# Altium PCB PCB1_t2.PcbDoc
Units mil, origin at the board's own origin, x right, y up, seen from the top; angles counter-clockwise.
Board outline 2375 x 2780 mil, 2 copper layers (Top Layer, Bottom Layer); 10 components, 13 nets, 57 pads, 0 vias.
Unrouted connection lines stored in the file: 7.
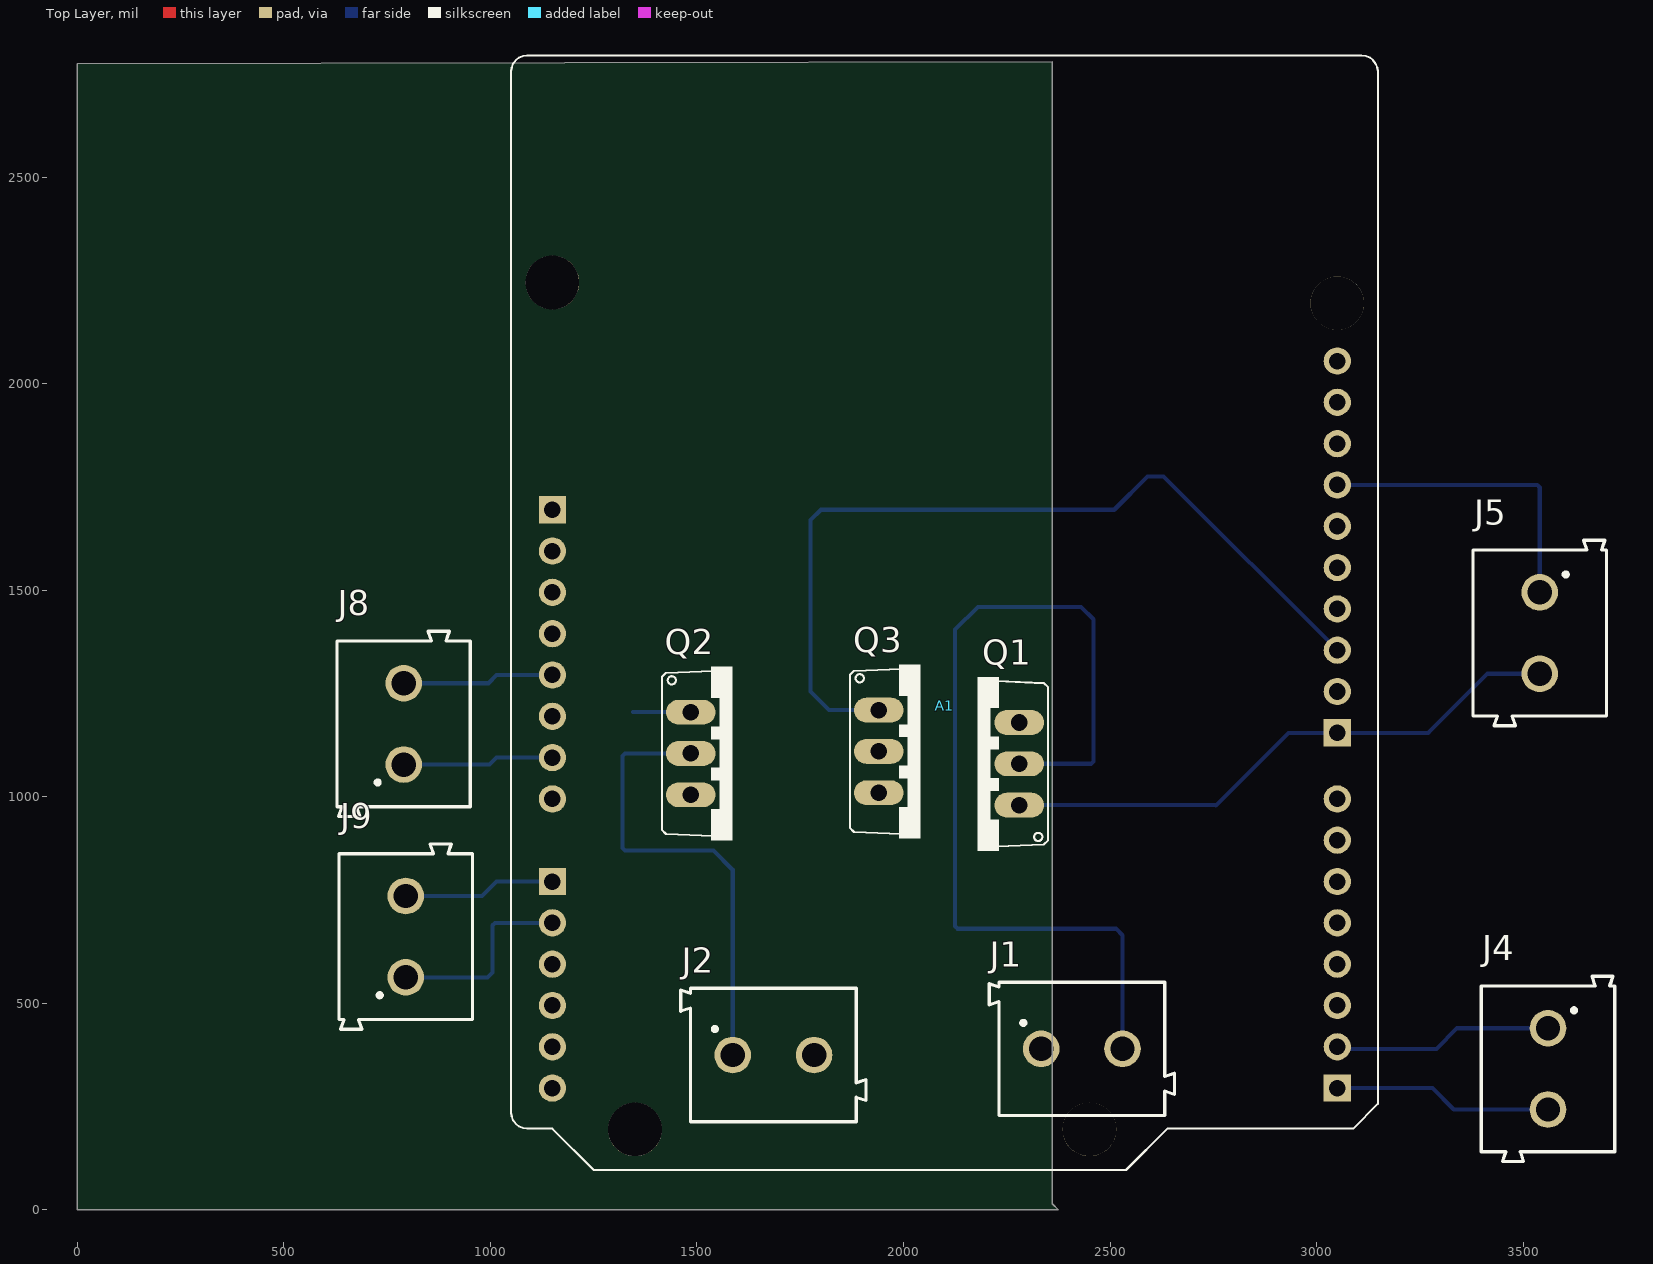
[diagram p0: Top Layer view]
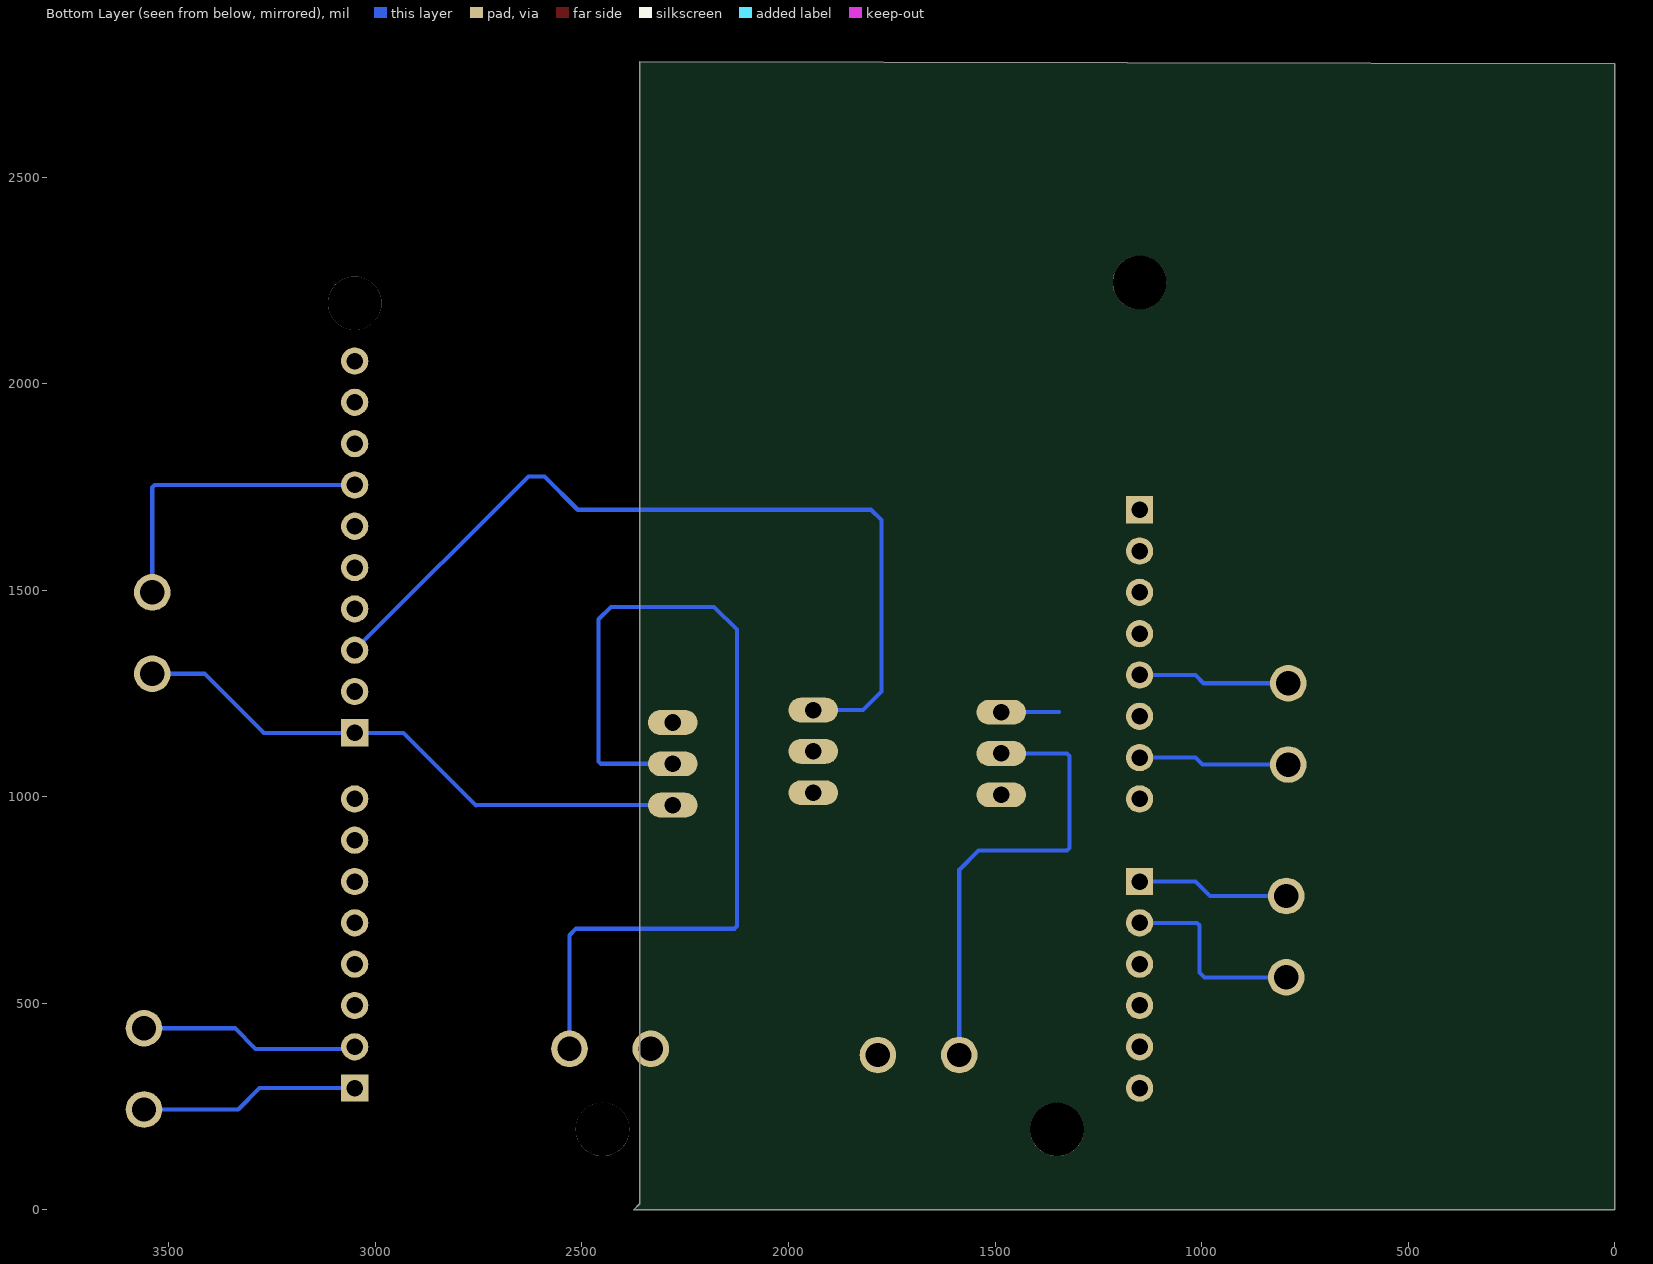
[diagram p1: Bottom Layer view, seen from below]

## Layer stack, top to bottom
Top Solder: solder mask 0.4, Solder Resist, Dk 3.5
Top Layer: signal copper 1.4
Dielectric 1: dielectric 12.6, FR-4, Dk 4.8
Bottom Layer: signal copper 1.4
Bottom Solder: solder mask 0.4, Solder Resist, Dk 3.5

## Board outline
0,2775 0,0 2375,0 2360,15 2360,2780

## Design rules (kind name [scope] priority, off if disabled: settings)
Clearance [All] p1: gap=10 ignorepadtopadclearanceinfootprint=FALSE except(0: Arc-Hole Track-Hole SMDPad-Hole THPad-Hole Via-Hole Fill-Hole Poly-Hole Region-Hole Text-Hole)
PolygonConnect [All] p1: connectstyle=Relief reliefconductorwidth=10 reliefentries=4 polygonreliefangle="90 Angle" airgapwidth=10
RoutingVias [All] p1: holewidth=28 width=50 viastyle="Through Hole" minholewidth=28 minwidth=50 maxholewidth=28 maxwidth=50
SolderMaskExpansion [All] p1: expansion=4 istentingtop=FALSE
Width [All] p1: maxlimit=24 minlimit=6 preferedwidth=12 minimp=50.000000 maximp=50.000000 favimp=50.000000
30 further rules are at their usual default settings.

## Components (designator, comment, footprint, x,y, rotation, side; value= is the part's Value field where it differs from the comment)
A1 "A000066" ARDUINO_A000066 1050,2795 r270 top locked
J1 "691111710002" 691111710002 2431.57,390 r0 top
J2 "691111710002" 691111710002 1685,375 r0 top
J4 "691111710002" 691111710002 3560,341.57 r270 top
J5 "691111710002" 691111710002 3540,1396.57 r270 top
J8 "691111710002" 691111710002 790,1176.57 r90 top
J9 "691111710002" 691111710002 795,661.57 r90 top
Q1 "FQP30N06L" TO220V 2180,1080 r90 top
Q2 "FQP30N06L" TO220V 1585,1105 r270 top
Q3 "FQP30N06L" TO220V 2040,1110 r270 top

## Footprints (in the part's own frame and the unit in brackets; to place one, negate y for a bottom-side part, rotate by r counter-clockwise, add the part's x,y. Pads: shape width x height; smd on the part's side, far side on the other; paste and mask are expansions set on the pad)
691111710002 [mm]
  round 2.25 hole 1.5: 1(-2.5,0) 2(2.5,0)
  silkscreen extent -5.7,-4.1 5.7,4.1
ARDUINO_A000066 [mil]
  round 66 hole 40: 3V3(1400,100) 5V(1500,100) A1(2100,100) A2(2200,100) A3(2300,100) A4(2400,100) A4(SDA)(840,2000) A5(2500,100) A5(SCL)(740,2000) AREF(940,2000) D1(2400,2000) D2(2300,2000) D3(2200,2000) D4(2100,2000) D5(2000,2000) D6(1900,2000) D7(1800,2000) D9(1540,2000) D10(1440,2000) D11(1340,2000) D12(1240,2000) D13(1140,2000) GND_1(1700,100) GND_2(1600,100) GND_3(1040,2000) IOREF(1200,100) RST(1300,100) VIN(1800,100)
  rect 66x66 / inner round 66 / far side rect 66x66 hole 40: A0(2000,100) D0(2500,2000) D8(1640,2000) P1(1100,100)
  round 129.92 hole 129.92 unplated: ""(550,100) ""(600,2000) ""(2600,1400) ""(2600,300)
  silkscreen extent 0,0 2698,2098, body extent -1606,-1050 1350,1050, height 467
TO220V [mil]
  oval 60x120 hole 40: 1(-100,-100) 2(0,-100) 3(100,-100)
  silkscreen extent -210,-170 210,0

## Part data
A1: "Microcontroller board based on the ATmega328P.", Package="Non-Standard Arduino", Availability="Not in stock", Check_prices=https://www.snapeda.com/parts/Arduino%20Uno%20Rev3/Arduino/view-part/?ref=eda, MF=Arduino, MP="Arduino Uno Rev3", Price=None, SnapEDA_Link=https://www.snapeda.com/parts/Arduino%20Uno%20Rev3/Arduino/view-part/?ref=snap
J1 J2 J4 J5 J8 J9: "2 Position Wire to Board Terminal Block Horizontal with Board 0.197 (5.00mm) Through Hole", Package=None, Check_prices=https://www.snapeda.com/parts/691111710002/Wurth+Electronics+Inc./view-part/?ref=eda, MF="Wurth Electronics", MP=691111710002, SnapEDA_Link=https://www.snapeda.com/parts/691111710002/Wurth+Electronics+Inc./view-part/?ref=snap
Q1 Q2 Q3: "N-Channel 60V 32A _Tc_ 79W _Tc_ Through Hole TO-220-3", Package="TO-220 ON Semiconductor", Availability=Unavailable, MF="ON Semiconductor", MP=FQP30N06L, Price=None, SnapEDA_Link=https://www.snapeda.com/parts/FQP30N06L/ON%20Semiconductor/view-part/1413126/?ref=snap

## Nets (pads, with @x,y where several pads share a name; then routed paths per layer and width w, separated by ;. In a path a pad name is that pad's centre, name@x,y a point inside that pad or via, vN(x,y) a via of type N, cw(c..) or ccw(c..) an arc to the next point about the centre after c; other vN are vias at no path point)
+12: J1.1
GND: A1.GND_1 A1.GND_2 A1.GND_3 J5.1 J8.1 Q1.3 Q2.3 Q3.3 | length 1113.5
  Bottom Layer w10: J8.1 998.15,1078.15 1015,1095 A1.GND_1 ; A1.GND_3 3534.14,1755 3540,1749.14 J5.1
NetA1_5V: A1.5V J8.2 | length 368.3
  Bottom Layer w10: J8.2 995,1275 1015,1295 A1.5V
NetA1_A0: A1.A0 J9.2 | length 369.5
  Bottom Layer w10: J9.2 980,760 1015,795 A1.A0
NetA1_A1: A1.A1 J9.1 | length 476.5
  Bottom Layer w10: J9.1 993.15,563.15 1005,575 1005,689.14 1010.86,695 A1.A1
NetA1_D0: A1.D0 J4.2 | length 531.5
  Bottom Layer w10: A1.D0 3280,295 3331.85,243.15 J4.2
NetA1_D1: A1.D1 J4.1 | length 532.8
  Bottom Layer w10: A1.D1 3055,390 3290,390 3340,440 J4.1
NetA1_D8: A1.D8 J5.2 Q1.1 | length 1392.5
  Bottom Layer w10: Q1.1 2755,980 2755.86,979.14 2931.72,1155 A1.D8 3270,1155 3413.15,1298.15 J5.2
NetA1_D9: A1.D9 Q2.1 | length 140
  Bottom Layer w10: 1345,1205 Q2.1
NetA1_D10: A1.D10 Q3.1 | length 2091.8
  Bottom Layer w10: Q3.1 1820,1210 1775,1255 1775,1670 1800,1695 2510,1695 2590.86,1775.86 2629.14,1775.86 A1.D10
NetJ1_2: J1.2 Q1.2 | length 2304.1
  Bottom Layer w10: Q1.2 2454.14,1080 2460,1085.86 2460,1430 2430,1460 2180,1460 2125,1405 2125,686.72 2130.86,680.86 2514.14,680.86 2530,665 J1.2
NetJ2_1: J2.1 Q2.2 | length 1127.4
  Bottom Layer w10: Q2.2 1325.86,1105 1320,1099.14 1320,875.86 1325.86,870 1540,870 1586.57,823.43 J2.1
NetJ2_2: J2.2 Q3.2 | length 11.9
  Bottom Layer w10: J2.2@1775,383.43 J2.2
pads on no net: A1. A1.3V3 A1.A2 A1.A3 A1.A4 A1.A4(SDA) A1.A5 A1.A5(SCL) A1.AREF A1.D2 A1.D3 A1.D4 A1.D5 A1.D6 A1.D7 A1.D11 A1.D12 A1.D13 A1.IOREF A1.P1 A1.RST A1.VIN

## Silkscreen, mask and mechanical layers (free items; w line width, h text height)
Mechanical 15:
  lines w39.37: 0,0 2359.41,0 2362.2,2.8 2362.2,2755.91 0,2755.91 0,0

## Text inside footprints (layer, text, board x,y; h text height)
Q1: Mechanical 13 "1" at 2305.25,954.75 h50.1 r90; Mechanical 13 "2" at 2305.17,1054.97 h50.07 r90; Mechanical 13 "3" at 2305.1,1155.06 h50.04 r90
Q2: Mechanical 13 "1" at 1459.75,1230.25 h50.1 r270; Mechanical 13 "2" at 1459.83,1130.03 h50.07 r270; Mechanical 13 "3" at 1459.9,1029.94 h50.04 r270
Q3: Mechanical 13 "1" at 1914.75,1235.25 h50.1 r270; Mechanical 13 "2" at 1914.83,1135.03 h50.07 r270; Mechanical 13 "3" at 1914.9,1034.94 h50.04 r270